# EAGLE board NightLight Outlet (1) (EAGLE 9.7.0)

Size 88.51 x 123.83 mm. Coordinates in mm from the lower left corner, seen from the top.
Outline: 0,0 88.5,0 88.5,123.83 0,123.83 0,0
Copper layers (1*16): Top 0.035mm / dielectric 1.5mm / Bottom 0.035mm
Design rules "default": minimum track width 6mil, minimum drill 0.35mm, track to track 6mil, track to pad 6mil, pad to pad 6mil, via to via 6mil, smd to smd 6mil, copper to edge 40mil, drill to drill 6mil, minimum pad ring 10mil, minimum via ring 8mil, stop-mask expansion 4mil, vias tented up to drill 0mil, thermal gap 10mil

## Footprints (pad centres in the part's own frame; a part is rotated, then mirrored left to right if it is on the bottom)
LEDRD254W60D565H860B_G = drill 0.981 pad 1.581: 1 -1.27,0; 2 1.27,0
28027 = drill 1.016 long: 1 -2.54,0; 2 0,0; 3 2.54,0
RESAD1016W63L850D250B = drill 0.83 pad 1.43: 1 -5.08,0; 2 5.08,0
GL5528 = drill 0.8 pad 1.4: 1 -1.702,0; 2 1.702,0
ARDUINO-UNO-R3-SHIELD = drill 1.016 pad 1.88: 3.3V 24.13,-2.54; 5V 24.13,0; A0 24.13,12.7; A1 24.13,15.24; A2 24.13,17.78; A3 24.13,20.32; A4 24.13,22.86; A5 24.13,25.4; AREF -24.13,-13.97; D2 -24.13,20.32; D3 -24.13,17.78; D4 -24.13,15.24; D5 -24.13,12.7; D6 -24.13,10.16; D7 -24.13,7.62; D8 -24.13,3.81; D9 -24.13,1.27; D10 -24.13,-1.27; D11 -24.13,-3.81; D12 -24.13,-6.35; D13 -24.13,-8.89; GND@0 24.13,2.54; GND@1 24.13,5.08; GND@2 -24.13,-11.43; IOREF 24.13,-7.62; NC 24.13,-10.16; RES 24.13,-5.08; RX -24.13,25.4; SCL -24.13,-19.05; SDA -24.13,-16.51; TX -24.13,22.86; VIN 24.13,7.62
DIP787W55P254L958H533Q8B-8P3 = drill 0.852 pad 1.452: 1 -3.81,3.81; 2 -3.81,1.27; 3 -3.81,-1.27; 4 -3.81,-3.81; 5 3.81,-3.81; 6 3.81,-1.27; 7 3.81,1.27; 8 3.81,3.81

## Placement (x,y rotation side)
D1  GREEN  [LEDRD254W60D565H860B_G]  35.19,97.16 180 top
PIRPIR_SENSOR  PIR-SENSOR_28027  [28027]  61.85,117.47 0 top
R2  220  [RESAD1016W63L850D250B]  36.45,84.45 90 top
R4  10  [RESAD1016W63L850D250B]  82.17,69.22 90 top
RPHOTORESISTOR  PHOTOCELL_GL5528  [GL5528]  80.91,81.92 0 top
U1  ARDUINO-UNO-R3-SHIELD  [ARDUINO-UNO-R3-SHIELD]  47.88,29.84 270 top
U2  ATtiny25-20PU  [DIP787W55P254L958H533Q8B-8P3]  60.28,36.35 90 top

## Library data of the parts
D1 = Tinkercad; CATEGORY: Opto-Electronic; SUB-CATEGORY: LED; VALUE: LED_GREEN
PIRPIR_SENSOR R2 R4 RPHOTORESISTOR U1 = Tinkercad
U2 = Tinkercad; CATEGORY: IC_Embedded; CORE: AVR; DESCRIPTION: AVR AVR® ATtiny, Functional Safety (FuSa) Microcontroller IC 8-Bit 20MHz 2KB (1K x 16) FLASH 8-PDIP; MANUFACTURER: Microchip Technology; MPN: ATtiny25-20PU; OPERATING_TEMP: -40°C to 85°C; PART_STATUS: Active; ROHS_COMPLIANT: COMPLIANT; SERIES: ATtiny25; SPEED: 20 MHz; SUB-CATEGORY: Microcontroller; TYPE: AVR Microcontroller

## Nets
D1_A: D1.1 R2.2
U1_5V: PIRPIR_SENSOR.2 RPHOTORESISTOR.1 U1.5V
U1_A0: R4.2 RPHOTORESISTOR.2 U1.A0
U1_D7: PIRPIR_SENSOR.1 U1.D7
U1_D10: R2.1 U1.D10
U1_GND: D1.2 PIRPIR_SENSOR.3 R4.1 U1.GND@0 U1.GND@1 U1.GND@2
U2_GND: U2.1 U2.4

## Tracks (layer width: path | path; a pad name or v marks a point on that pad's centre or on a via)
D1_A  (1 unrouted)
U1_5V  (2 unrouted)
U1_A0  (2 unrouted)
U1_D7  (1 unrouted)
U1_D10  (1 unrouted)
U1_GND  (5 unrouted)
U2_GND  (1 unrouted)